# EAGLE board hw2 (EAGLE 8.7.1)
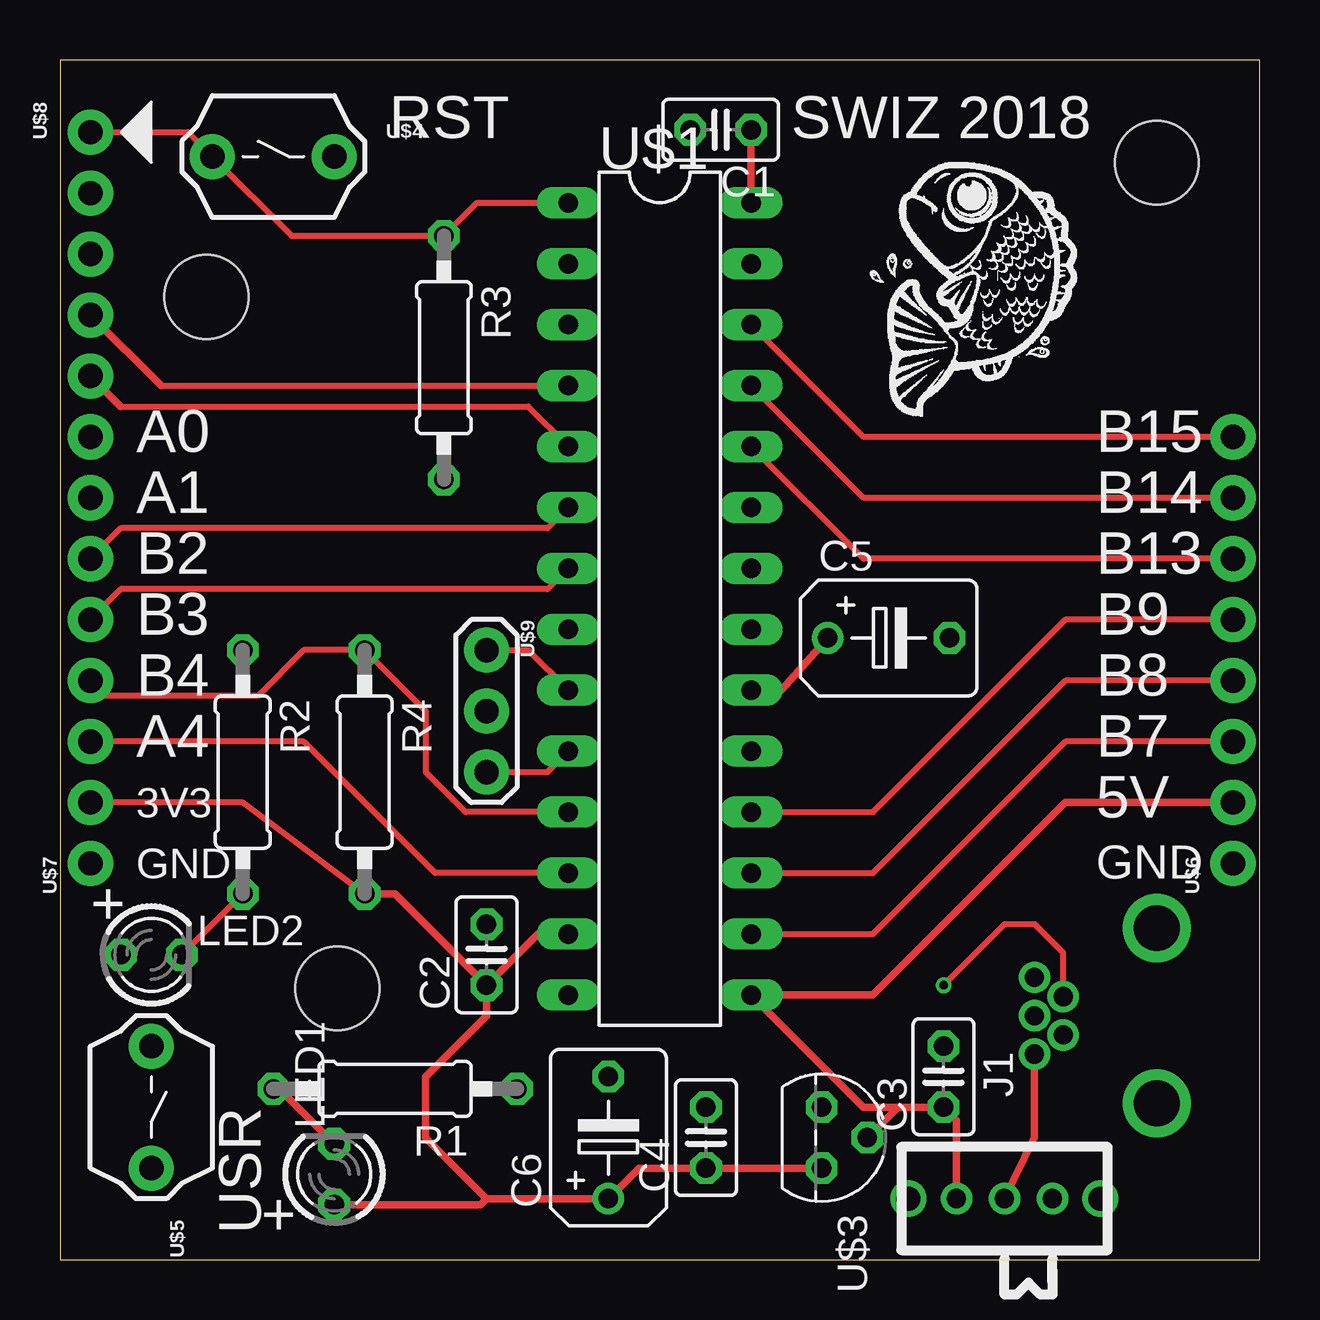
[diagram p0: board, top side]
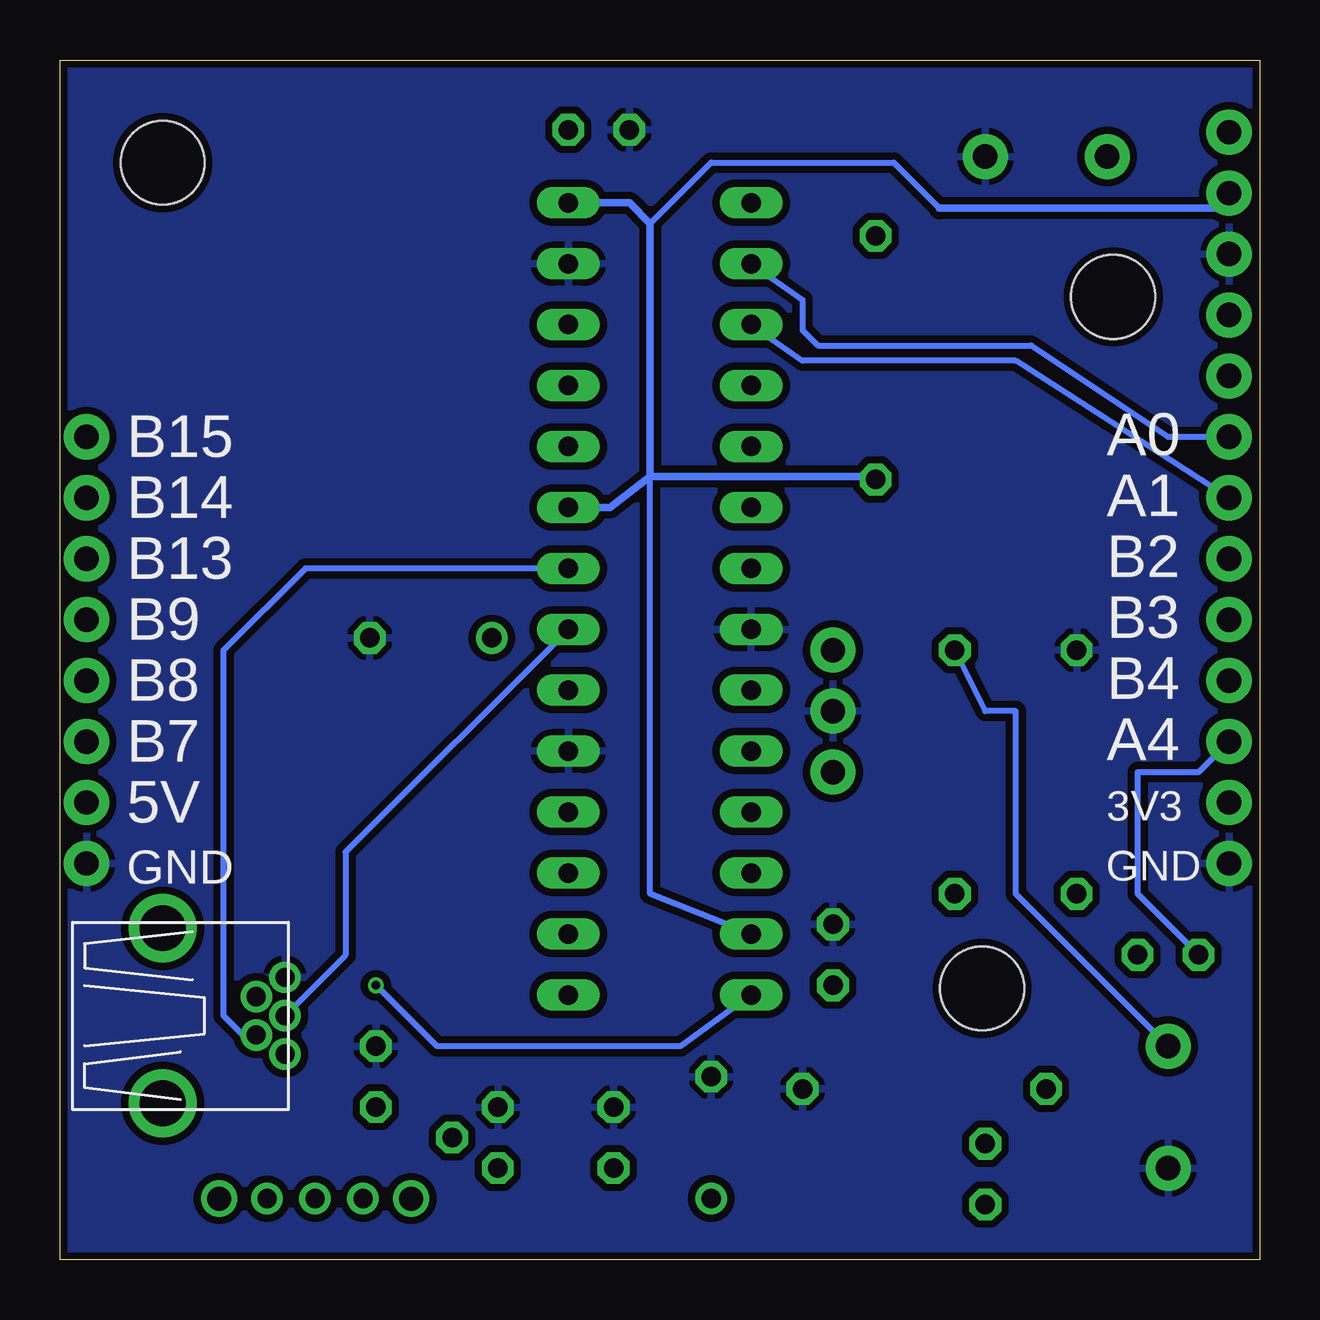
[diagram p1: board, bottom side, seen from below]

Size 50 x 50 mm. Coordinates in mm from the lower left corner, seen from the top.
Outline: 0,0 50,0 50,50 0,50 0,0
Copper layers (1*16): Top 0.035mm / dielectric 1.5mm / Bottom 0.035mm
Design rules "SeeedStudio_2layer_DRU_no_angle_20140221": minimum track width 6mil, minimum drill 12mil, track to track 6mil, track to pad 6mil, pad to pad 6mil, via to via 6mil, smd to smd 0mil, copper to edge 10mil, drill to drill 10mil, minimum pad ring 10mil, minimum via ring 6mil, stop-mask expansion 2mil, vias tented up to drill 100mil, thermal gap 10mil
Holes 3.5 mm at 45.72,45.72 6.1,40.13 11.56,11.3

## Footprints (pad centres in the part's own frame; a part is rotated, then mirrored left to right if it is on the bottom)
C025-025X050 = drill 0.813 octagon: 1 -1.27,0; 2 1.27,0
B45181B = drill 0.813: + -2.54,0 | drill 0.813 octagon: - 2.54,0
USB-MB-H = drill 0.8: D+ 5.1,0; D- 3.9,0.8; GND 5.1,-1.6; ID 3.9,-0.8; VBUS 5.1,1.6 | drill 1.9: P$6 0,-3.65; P$7 0,3.65
LED3MM = drill 0.813 octagon: A -1.27,0; K 1.27,0
0207/10 = drill 0.813 octagon: 1 -5.08,0; 2 5.08,0
DIL28-3 = drill 0.813 long: 1 -16.51,-3.81; 2 -13.97,-3.81; 3 -11.43,-3.81; 4 -8.89,-3.81; 5 -6.35,-3.81; 6 -3.81,-3.81; 7 -1.27,-3.81; 8 1.27,-3.81; 9 3.81,-3.81; 10 6.35,-3.81; 11 8.89,-3.81; 12 11.43,-3.81; 13 13.97,-3.81; 14 16.51,-3.81; 15 16.51,3.81; 16 13.97,3.81; 17 11.43,3.81; 18 8.89,3.81; 19 6.35,3.81; 20 3.81,3.81; 21 1.27,3.81; 22 -1.27,3.81; 23 -3.81,3.81; 24 -6.35,3.81; 25 -8.89,3.81; 26 -11.43,3.81; 27 -13.97,3.81; 28 -16.51,3.81
SLIDE = drill 0.8: 1 -2,0; 2 0,0; 3 2,0 | drill 1: P$1 -4,0; P$2 4,0
TO92 = drill 0.813 octagon: 1 -1.27,0; 2 0,1.905; 3 1.27,0
PB = drill 1.016 pad 1.88: 1 -2.54,0; 2 2.54,0
1X08 = drill 1.016 pad 1.88: 1 0,0; 2 2.54,0; 3 5.08,0; 4 7.62,0; 5 10.16,0; 6 12.7,0; 7 15.24,0; 8 17.78,0
1X05 = drill 1.016 pad 1.88: 1 0,0; 2 2.54,0; 3 5.08,0; 4 7.62,0; 5 10.16,0
OSC = drill 1.016 pad 1.88: 1 -2.54,0; 2 0,0; 3 2.54,0

## Placement (x,y rotation side)
C1  0.1uF  [C025-025X050]  27.54,47.09 180 top
C2  0.1uF  [C025-025X050]  17.78,12.7 90 top
C3  0.1uF  [C025-025X050]  36.83,7.62 90 top
C4  0.1uF  [C025-025X050]  26.92,5.08 90 top
C5  10uF  [B45181B]  34.54,25.91 0 top
C6  10uF  [B45181B]  22.86,5.08 90 top
J1  USB-MB-H  [USB-MB-H]  45.72,10.16 180 top
LED1  Red  [LED3MM]  11.43,3.56 90 top
LED2  Green  [LED3MM]  3.81,12.7 0 top
R1  330  [0207/10]  13.97,7.11 180 top
R2  330  [0207/10]  7.62,20.32 270 top
R3  10k  [0207/10]  16,37.59 270 top
R4  10k  [0207/10]  12.7,20.32 270 top
U$1  PIC32MX250F128B  [DIL28-3]  25,27.54 270 top
U$2  SLIDE  [SLIDE]  39.37,2.54 180 top
U$3  MCP1702  [TO92]  31.75,5.08 270 top
U$4  RESET  [PB]  8.89,45.97 0 top
U$5  USER  [PB]  3.81,6.35 270 top
U$6  CONN_08  [1X08]  48.9,16.51 90 top
U$7  CONN_08  [1X08]  1.27,16.51 90 top
U$8  PICKIT3  [1X05]  1.27,46.99 270 top
U$9  8MHz  [OSC]  17.78,22.86 270 top

## Library data of the parts
C1-C6 J1 R1-R4 U$1-U$9 = hw2
LED1 LED2 = led

## Nets
+3V3: C1.1 C2.1 C4.1 C6.+ LED1.A R3.2 R4.2 U$1.13 U$1.23 U$1.28 U$3.3 U$7.2 U$8.2
+5V: C3.1 U$1.15 U$2.3 U$3.2 U$6.2
A0: U$1.2 U$7.8
A1: U$1.3 U$7.7
A4/LED: LED2.A U$1.12 U$7.3
B2: U$1.6 U$7.6
B3: U$1.7 U$7.5
B4/USER: R4.1 U$1.11 U$5.1 U$7.4
B7: U$1.16 U$6.3
B8: U$1.17 U$6.4
B9: U$1.18 U$6.5
B13: U$1.24 U$6.6
B14: U$1.25 U$6.7
B15: U$1.26 U$6.8
D+: J1.D+ U$1.21
D-: J1.D- U$1.22
GND: C1.2 C2.2 C3.2 C4.2 C5.- C6.- J1.GND R1.1 R2.1 U$1.8 U$1.19 U$1.27 U$3.1 U$4.2 U$5.2 U$6.1 U$7.1 U$8.3 U$9.2
MCLR: R3.1 U$1.1 U$4.1 U$8.1
N$1: J1.VBUS U$2.2
N$2: U$1.9 U$9.1
N$3: U$1.10 U$9.3
N$4: LED1.K R1.2
N$5: LED2.K R2.2
N$6: C5.+ U$1.20
PGC: U$1.5 U$8.5
PGD: U$1.4 U$8.4
USBID: J1.ID U$1.14

## Tracks (layer width: path | path; a pad name or v marks a point on that pad's centre or on a via)
+3V3
  Top 0.254: R4.2 7.62,19.05 U$7.2
  Top 0.305: U$3.3 C4.1 24.13,3.81 C6.+ 17.78,2.54 | C2.1 19.92,13.57 U$1.13 | C2.1 17.78,10.16 15.24,7.62 15.24,5.08 17.78,2.54 | C1.1 U$1.28 | U$1.28 | C2.1 13.97,15.24 R4.2 | LED1.A 17.53,2.29 17.78,2.54
  Bottom 0.254: U$1.13 25.4,15.24 25.4,32.64 | 25.4,43.18 22.86,45.72 15.24,45.72 13.34,43.81
  Bottom 0.305: U$1.28 26.27,44.05 25.4,43.18 25.4,32.64 | 25.4,32.64 27.07,31.35 U$1.23 | R3.2 16.13,32.64 25.4,32.64 | U$8.2 1.91,43.81 13.34,43.81
+5V
  Top 0.254: U$6.2 48.83,19.05
  Top 0.305: 34.92,6.35 U$3.2 | 34.92,6.35 33.49,6.35 U$1.15 33.89,11.03 41.91,19.05 48.83,19.05 | 34.92,6.35 C3.1 37.37,5.81 U$2.3
A0
  Bottom 0.254: U$7.8 3.81,34.29 9.53,38.1 18.41,38.1 19.05,38.73 19.05,40.01 U$1.2
A1
  Bottom 0.254: U$1.3 19.05,37.47 10.16,37.47 U$7.7
A4/LED
  Top 0.254: U$1.12 15.64,16.11 10.16,21.59 U$7.3
  Bottom 0.254: LED2.A 5.08,15.24 5.08,20.32 2.54,20.32 U$7.3
B2
  Top 0.254: U$1.6 20.32,30.48 2.54,30.48 U$7.6
B3
  Top 0.254: U$1.7 20.32,27.94 2.54,27.94 U$7.5
B4/USER
  Top 0.254: U$1.11 16.91,18.65 15.24,20.32 15.24,22.86 R4.1 10.16,25.4 8.26,23.5 1.91,23.5 U$7.4
  Bottom 0.254: U$5.1 10.16,15.24 10.16,22.86 11.43,22.86 R4.1
B7
  Top 0.254: U$1.16 33.89,13.57 41.91,21.59 U$6.3
B8
  Top 0.254: U$1.17 33.89,16.11 41.91,24.13 U$6.4
B9
  Top 0.254: U$1.18 33.89,18.65 41.91,26.67 U$6.5
B13
  Top 0.254: U$1.24 33.49,29.21 U$6.6
B14
  Top 0.254: U$1.25 33.49,31.75 U$6.7
B15
  Top 0.254: U$1.26 33.49,34.29 U$6.8
D+
  Bottom 0.254: U$1.21 38.1,16.98 38.1,12.68 J1.D+
D-
  Bottom 0.254: U$1.22 39.77,28.81 43.18,25.4 43.18,10.16 42.38,9.36 J1.D-
GND
  pour Bottom (isolate 0.305): -1.27,50.8 50.8,50.8 50.8,-1.27 -1.27,-1.27
MCLR
  Top 0.254: U$8.1 5.33,46.99 U$4.1 9.65,42.67 R3.1 17.38,44.05 U$1.1
N$1
  Top 0.305: J1.VBUS 40.62,5.1 U$2.2
N$2
  Top 0.254: U$9.1 19.52,25.4 U$1.9
N$3
  Top 0.254: U$9.3 20.32,20.32 U$1.10
N$4
  Top 0.305: LED1.K 9.14,7.11 R1.2
N$5
  Top 0.254: LED2.K R2.2
N$6
  Top 0.305: U$1.20 30.08,23.73 C5.+
PGC
  Top 0.254: U$1.5 19.52,35.56 2.54,35.56
  Top 0.305: U$8.5 2.54,35.56
PGD
  Top 0.254: 4.21,36.43 U$1.4
  Top 0.305: U$8.4 4.21,36.43
USBID  (via drill 0.35)
  Top 0.254: v36.83,11.43 39.37,13.97 40.64,13.97 41.82,12.79 J1.ID
  Bottom 0.254: U$1.14 24.13,8.89 34.29,8.89 v36.83,11.43

## Text on the board
tPlace: RST | SWIZ 2018 | A0 | B15 | A1 | B14 | B2 | B13 | B3 | B9 | B4 | B8 | A4 | B7 | 3V3 | 5V | GND | GND | + | USR | +
bPlace: A0 | B15 | A1 | B14 | B2 | B13 | B3 | B9 | B4 | B8 | A4 | B7 | 3V3 | 5V | GND | GND